# EAGLE board PCB_board (EAGLE 9.6.2)
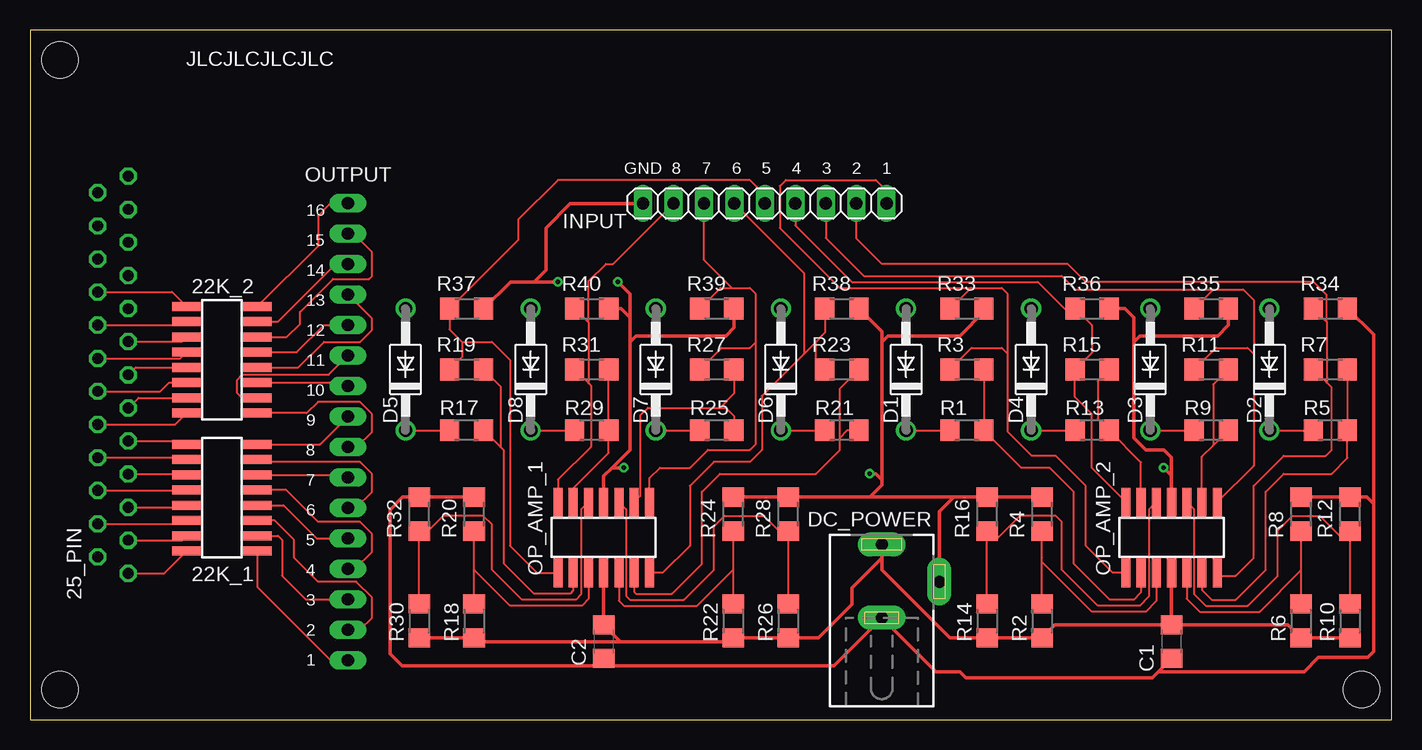
[diagram p0: board, top side]
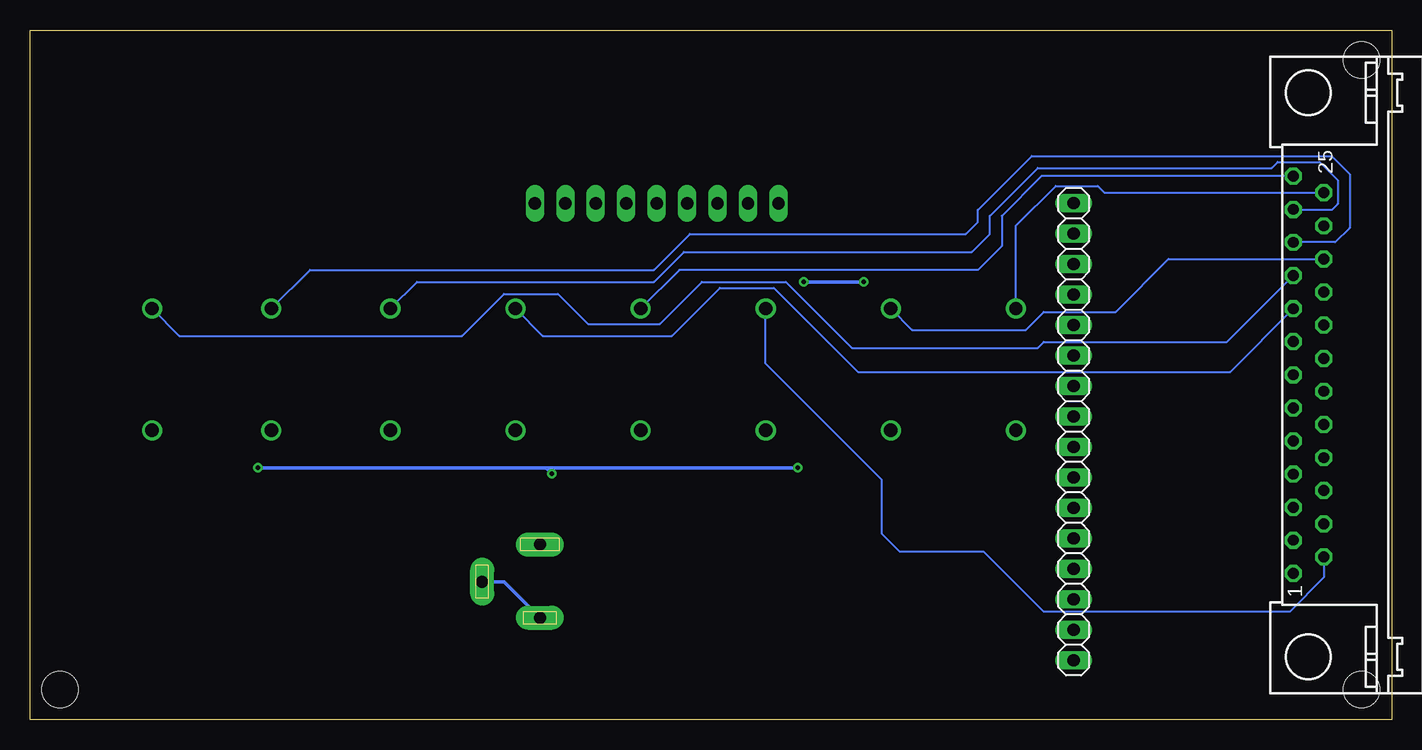
[diagram p1: board, bottom side, seen from below]

Size 113.5 x 57.5 mm. Coordinates in mm from the lower left corner, seen from the top.
Outline: 0,0 113.5,0 113.5,57.5 0,57.5 0,0
Copper layers (1*16): Top 0.035mm / dielectric 1.5mm / Bottom 0.035mm
Design rules "default": minimum track width 6mil, minimum drill 0.35mm, track to track 6mil, track to pad 6mil, pad to pad 6mil, via to via 6mil, smd to smd 6mil, copper to edge 40mil, drill to drill 6mil, minimum pad ring 10mil, minimum via ring 8mil, stop-mask expansion 4mil, vias tented up to drill 0mil, thermal gap 10mil
Holes 3 mm at 2.5,2.5 2.5,55 111,2.5

## Footprints (pad centres in the part's own frame; a part is rotated, then mirrored left to right if it is on the bottom)
1365-16 = smd 0.76 x 2.4: 1 -4.445,-2.95; 2 -4.445,2.95; 3 -3.175,-2.95; 4 -3.175,2.95; 5 -1.905,-2.95; 6 -1.905,2.95; 7 -0.635,-2.95; 8 -0.635,2.95; 9 0.635,-2.95; 10 0.635,2.95; 11 1.905,-2.95; 12 1.905,2.95; 13 3.175,-2.95; 14 3.175,2.95; 15 4.445,-2.95; 16 4.445,2.95
M25-HD-20 = drill 0.9 pad 1.3 octagon: 1 -16.561,1.27; 2 -13.792,1.27; 3 -11.049,1.27; 4 -8.28,1.27; 5 -5.512,1.27; 6 -2.769,1.27; 7 0,1.27; 8 2.769,1.27; 9 5.512,1.27; 10 8.28,1.27; 11 11.049,1.27; 12 13.792,1.27; 13 16.561,1.27; 14 -15.189,-1.27; 15 -12.421,-1.27; 16 -9.652,-1.27; 17 -6.909,-1.27; 18 -4.14,-1.27; 19 -1.372,-1.27; 20 1.372,-1.27; 21 4.14,-1.27; 22 6.909,-1.27; 23 9.652,-1.27; 24 12.421,-1.27; 25 15.189,-1.27
C1206 = smd 1.6 x 1.8: 1 -1.4,0; 2 1.4,0
DO41-10 = drill 1.118: A 5.08,0; C -5.08,0
DCJ0303 = drill 1 pad 2 long: 1 0,3.1; 2 4.8,0; 3 0,-3
1X09 = drill 1.016 long: 1 -10.16,0; 2 -7.62,0; 3 -5.08,0; 4 -2.54,0; 5 0,0; 6 2.54,0; 7 5.08,0; 8 7.62,0; 9 10.16,0
1365-14 = smd 0.76 x 2.4: 1 -3.81,-2.95; 2 -3.81,2.95; 3 -2.54,-2.95; 4 -2.54,2.95; 5 -1.27,-2.95; 6 -1.27,2.95; 7 0,-2.95; 8 0,2.95; 9 1.27,-2.95; 10 1.27,2.95; 11 2.54,-2.95; 12 2.54,2.95; 13 3.81,-2.95; 14 3.81,2.95
1X16 = drill 1.016 long: 1 -19.05,0; 2 -16.51,0; 3 -13.97,0; 4 -11.43,0; 5 -8.89,0; 6 -6.35,0; 7 -3.81,0; 8 -1.27,0; 9 1.27,0; 10 3.81,0; 11 6.35,0; 12 8.89,0; 13 11.43,0; 14 13.97,0; 15 16.51,0; 16 19.05,0
R1206 = smd 1.6 x 1.803: 1 -1.422,0; 2 1.422,0

## Placement (x,y rotation side)
22K_1  1365-16  [1365-16]  16,18.5 90 top
22K_2  1365-16  [1365-16]  16,30 90 top
25_PIN  M25-HD-20  [M25-HD-20]  6.92,28.75 90 bottom
C1  0.0000001  [C1206]  95.16,6.5 270 top
C2  0.0000001  [C1206]  47.82,6.5 270 top
D1  1N4004  [DO41-10]  73.03,29.19 90 top
D2  1N4004  [DO41-10]  103.32,29.19 90 top
D3  1N4004  [DO41-10]  93.39,29.19 90 top
D4  1N4004  [DO41-10]  83.46,29.19 90 top
D5  1N4004  [DO41-10]  31.31,29.19 90 top
D6  1N4004  [DO41-10]  62.6,29.19 90 top
D7  1N4004  [DO41-10]  52.17,29.19 90 top
D8  1N4004  [DO41-10]  41.74,29.19 90 top
DC_POWER  [DCJ0303]  71,11.5 0 top
INPUT  [1X09]  61.26,43.03 180 top
OP_AMP_1  1365-14  [1365-14]  47.82,15.18 0 top
OP_AMP_2  1365-14  [1365-14]  95.16,15.18 0 top
OUTPUT  [1X16]  26.5,24 270 bottom
R1  1000000  [R1206]  78.11,24.11 0 top
R2  1000000  [R1206]  84.36,8.23 90 top
R3  200000  [R1206]  78.11,29.19 180 top
R4  200000  [R1206]  84.36,17.12 270 top
R5  1000000  [R1206]  108.4,24.11 0 top
R6  1000000  [R1206]  105.95,8.23 90 top
R7  200000  [R1206]  108.4,29.19 180 top
R8  200000  [R1206]  105.95,17.12 270 top
R9  1000000  [R1206]  98.47,24.11 0 top
R10  1000000  [R1206]  110.03,8.23 90 top
R11  200000  [R1206]  98.47,29.19 180 top
R12  200000  [R1206]  110.03,17.12 270 top
R13  1000000  [R1206]  88.54,24.11 0 top
R14  1000000  [R1206]  79.78,8.23 90 top
R15  200000  [R1206]  88.54,29.19 180 top
R16  200000  [R1206]  79.78,17.12 270 top
R17  1000000  [R1206]  36.39,24.11 0 top
R18  1000000  [R1206]  37.02,8.23 90 top
R19  200000  [R1206]  36.39,29.19 180 top
R20  200000  [R1206]  37.02,17.12 270 top
R21  1000000  [R1206]  67.68,24.11 0 top
R22  1000000  [R1206]  58.62,8.23 90 top
R23  200000  [R1206]  67.68,29.19 180 top
R24  200000  [R1206]  58.62,17.12 270 top
R25  1000000  [R1206]  57.25,24.11 0 top
R26  1000000  [R1206]  63.2,8.23 90 top
R27  200000  [R1206]  57.25,29.19 180 top
R28  200000  [R1206]  63.2,17.12 270 top
R29  1000000  [R1206]  46.82,24.11 0 top
R30  1000000  [R1206]  32.45,8.23 90 top
R31  200000  [R1206]  46.82,29.19 180 top
R32  200000  [R1206]  32.45,17.12 270 top
R33  10000  [R1206]  78.11,34.27 180 top
R34  10000  [R1206]  108.4,34.27 180 top
R35  10000  [R1206]  98.47,34.27 180 top
R36  10000  [R1206]  88.54,34.27 180 top
R37  10000  [R1206]  36.39,34.27 180 top
R38  10000  [R1206]  67.68,34.27 180 top
R39  10000  [R1206]  57.25,34.27 180 top
R40  10000  [R1206]  46.82,34.27 180 top

## Library data of the parts
22K_1 22K_2 OP_AMP_1 OP_AMP_2 = con-leotronics; OC_FARNELL: unknown; OC_NEWARK: unknown
25_PIN = con-subd; OC_FARNELL: unknown; OC_NEWARK: unknown
C1 C2 = rcl; SPICEPREFIX: C
D1-D8 = diode
DC_POWER = con-jack; OC_FARNELL: unknown; OC_NEWARK: unknown
INPUT OUTPUT = pinhead
R1-R40 = rcl; SPICEPREFIX: R

## Nets
GND: C1.2 C2.2 DC_POWER.2 DC_POWER.3 INPUT.9 OP_AMP_1.8 OP_AMP_2.8 R4.1 R8.1 R12.1 R16.1 R20.1 R24.1 R28.1 R32.1 R33.1 R34.1 R35.1 R36.1 R37.1 R38.1 R39.1 R40.1
IN_1: D1.C R1.1
IN_2: D2.C R5.1
IN_3: D3.C R9.1
IN_4: D4.C R13.1
IN_5: D5.C R17.1
IN_6: D6.C R21.1
IN_7: D7.C R25.1
IN_8: D8.C R29.1
INV_1A: OP_AMP_2.3 R1.2 R3.1
INV_1B: OP_AMP_2.11 R5.2 R7.1
INV_1C: OP_AMP_2.12 R9.2 R11.1
INV_1D: OP_AMP_2.4 R13.2 R15.1
INV_2A: OP_AMP_1.3 R17.2 R19.1
INV_2B: OP_AMP_1.11 R21.2 R23.1
INV_2C: OP_AMP_1.12 R25.2 R27.1
INV_2D: OP_AMP_1.4 R29.2 R31.1
N$1: 25_PIN.9 D1.A
N$2: 25_PIN.10 D2.A
N$3: 25_PIN.11 D3.A
N$4: 25_PIN.12 D4.A
N$5: 25_PIN.25 D5.A
N$6: 25_PIN.13 D6.A
N$7: 25_PIN.23 D8.A
N$8: 25_PIN.14 D7.A
NON_1A: OP_AMP_2.5 R2.2 R4.2
NON_1B: OP_AMP_2.9 R6.2 R8.2
NON_1C: OP_AMP_2.10 R10.2 R12.2
NON_1D: OP_AMP_2.6 R14.2 R16.2
NON_2A: OP_AMP_1.5 R18.2 R20.2
NON_2B: OP_AMP_1.9 R22.2 R24.2
NON_2C: OP_AMP_1.10 R26.2 R28.2
NON_2D: OP_AMP_1.6 R30.2 R32.2
O_1: 22K_1.1 OUTPUT.16
O_2: 22K_1.5 OUTPUT.15
O_3: 22K_1.3 OUTPUT.14
O_4: 22K_1.9 OUTPUT.13
O_5: 22K_1.7 OUTPUT.12
O_6: 22K_1.13 OUTPUT.11
O_7: 22K_1.11 OUTPUT.10
O_8: 22K_2.1 OUTPUT.9
O_9: 22K_1.15 OUTPUT.8
O_10: 22K_2.5 OUTPUT.7
O_11: 22K_2.3 OUTPUT.6
O_12: 22K_2.9 OUTPUT.5
O_13: 22K_2.7 OUTPUT.4
O_14: 22K_2.13 OUTPUT.3
O_15: 22K_2.11 OUTPUT.2
O_16: 22K_2.15 OUTPUT.1
OUT_1: 22K_1.2 25_PIN.1
OUT_1A: INPUT.1 OP_AMP_2.1 R3.2 R33.2
OUT_1B: INPUT.2 OP_AMP_2.13 R7.2 R34.2
OUT_1C: INPUT.3 OP_AMP_2.14 R11.2 R35.2
OUT_1D: INPUT.4 OP_AMP_2.2 R15.2 R36.2
OUT_2: 22K_1.6 25_PIN.15
OUT_2A: INPUT.5 OP_AMP_1.1 R19.2 R37.2
OUT_2B: INPUT.6 OP_AMP_1.13 R23.2 R38.2
OUT_2C: INPUT.7 OP_AMP_1.14 R27.2 R39.2
OUT_2D: INPUT.8 OP_AMP_1.2 R31.2 R40.2
OUT_3: 22K_1.4 25_PIN.2
OUT_4: 22K_1.10 25_PIN.16
OUT_5: 22K_1.8 25_PIN.3
OUT_6: 22K_1.14 25_PIN.17
OUT_7: 22K_1.12 25_PIN.4
OUT_8: 22K_2.2 25_PIN.18
OUT_9: 22K_1.16 25_PIN.5
OUT_10: 22K_2.6 25_PIN.19
OUT_11: 22K_2.4 25_PIN.6
OUT_12: 22K_2.10 25_PIN.20
OUT_13: 22K_2.8 25_PIN.7
OUT_14: 22K_2.14 25_PIN.21
OUT_15: 22K_2.12 25_PIN.8
OUT_16: 22K_2.16 25_PIN.22
VCC: C1.1 C2.1 DC_POWER.1 OP_AMP_1.7 OP_AMP_2.7 R2.1 R6.1 R10.1 R14.1 R18.1 R22.1 R26.1 R30.1

## Tracks (layer width: path | path; a pad name or v marks a point on that pad's centre or on a via)
GND  (via drill 0.35)
  Top 0.305: OP_AMP_1.8 47.82,20.32 48.5,21 | 48.5,21 50,22.5 50,31.5 | R40.1 49.27,34.27 50,33.54 | OP_AMP_2.8 95.16,20.5 | 95.16,20.5 95.16,21.84 94.5,22.5 93,22.5 92,23.5 92,31.5 | R36.1 91.27,34.27 92,33.54 92,31.5 | R20.1 R32.1 31.05,18.55 30,17.5 30,5.5 31,4.5 47.22,4.5 C2.2 48.42,4.5 67,4.5 DC_POWER.3 75.5,4 77.5,4 78,3.5 93.56,3.5 94.06,4 | R8.1 R12.1 111.45,18.55 112,18 | 112,18 112,5.67 111.5,5.17 107.39,5.17 106.23,4 94.06,4 | C1.2 94.06,4 | R24.1 R28.1 70,18.55 | 70,18.55 77,18.55 | 77,18.55 R16.1 R4.1 | DC_POWER.2 75.8,17.35 77,18.55 | 50,31.5 50,33.54 | R39.1 58.67,32.67 58,32 50.5,32 50,31.5 | 70,18.55 71,19.55 71,20 | 71,31.5 71,32.37 R38.1 | 71,31.5 71,20 | 71,31.5 71.5,32 77.5,32 79.53,34.03 R33.1 | R35.1 99.89,32.89 99,32 92.5,32 92,31.5 | R34.1 112,32.09 112,18 | R37.1 40.04,36.5 42,36.5 | 42,36.5 v44,36.5 | v49,36.5 50,35.5 50,33.54 | 95.16,20.5 95,20.5 v94.5,21 | v70,20.5 70.5,20.5 71,20 | 48.5,21 v49.5,21 | INPUT.9 45.03,43.03 43,41 43,37.5 42,36.5
  Bottom 0.305: v44,36.5 v49,36.5 | DC_POWER.3 74,11.5 DC_POWER.2 | v94.5,21 70.5,21 | 70.5,21 v70,20.5 | v49.5,21 70.5,21
IN_1
  Top 0.152: D1.C R1.1
IN_2
  Top 0.152: D2.C R5.1
IN_3
  Top 0.152: D3.C R9.1
IN_4
  Top 0.152: D4.C R13.1
IN_5
  Top 0.152: D5.C R17.1
IN_6
  Top 0.152: D6.C R21.1
IN_7
  Top 0.152: D7.C R25.1
IN_8
  Top 0.152: D8.C R29.1
INV_1A
  Top 0.152: OP_AMP_2.3 92.62,10.62 92,10 90,10 87,13 87,19 85,21 82.64,21 79.57,24.07 R1.2 R3.1
INV_1B
  Top 0.152: OP_AMP_2.11 97.7,10.8 98.5,10 100.5,10 103,12.5 103,19 104.5,20.5 108.5,20.5 109.82,21.82 109.82,24 R5.2 R7.1
INV_1C
  Top 0.152: OP_AMP_2.12 97.7,21.92 98.64,22.86 | 98.64,22.86 R9.2 | R11.1 98.64,27.94 98.64,22.86
INV_1D
  Top 0.152: OP_AMP_2.4 92.62,21.45 R13.2 89,25.07 89,28.23 R15.1
INV_2A
  Top 0.152: OP_AMP_1.3 45.28,10.78 45,10.5 42,10.5 39.5,13 39.5,22.42 39.21,22.71 | 39.21,22.71 R17.2 | R19.1 39.21,27.79 39.21,22.71
INV_2B
  Top 0.152: OP_AMP_1.11 50.36,10.64 50.5,10.5 53.5,10.5 56,13 56,19 57.5,20.5 65.5,20.5 67.5,22.5 67.5,23.5 | R23.1 67.5,27.59 67.5,23.5 | R21.2 68.11,24.11 67.5,23.5
INV_2C
  Top 0.152: OP_AMP_1.12 50.86,18.63 50.86,25.36 51.5,26 57.5,26 | 57.5,26 58,26 58.67,25.33 R25.2 | R27.1 58.67,27.17 57.5,26
INV_2D
  Top 0.152: OP_AMP_1.4 45.28,19.28 48.24,22.24 R29.2 R31.1
N$1
  Bottom 0.152: D1.A 70.76,32 60,32 56,36 51.5,36 44.5,29 13.45,29 25_PIN.9
N$2
  Bottom 0.152: D2.A 101.05,32 77.5,32 74,35.5 69.5,35.5 67,33 61,33 57.5,36.5 50.5,36.5 45,31 29.5,31 29,31.5 13.72,31.5 25_PIN.10
N$3
  Bottom 0.152: D3.A 90.16,37.5 61.5,37.5 58.5,40.5 35.5,40.5 34.5,41.5 34.5,42.5 30,47 5,47 3.5,45.5 3.5,41 4.71,39.79 25_PIN.11
N$4
  Bottom 0.152: D4.A 81.23,36.5 61.5,36.5 59,39 35,39 33.5,40.5 33.5,42 29.5,46 10,46 9.5,46.5 6,46.5 4.5,45 4.5,43 5,42.5 8.16,42.5 25_PIN.12
N$5
  Bottom 0.152: D5.A 31.31,41.19 28,44.5 24.5,44.5 23.93,43.93 25_PIN.25
N$6
  Bottom 0.152: 25_PIN.13 29.19,45.31 32.5,42 32.5,39.5 34.5,37.5 59.37,37.5 D6.A
N$7
  Bottom 0.152: D8.A 39.97,32.5 30.5,32.5 29,34 23,34 18.6,38.4 25_PIN.23
N$8
  Bottom 0.152: 25_PIN.14 5.66,11.85 8.5,9 29,9 34,14 41,14 42.5,15.5 42.5,20 52.17,29.67 D7.A
NON_1A
  Top 0.152: OP_AMP_2.5 93.89,9.89 93,9 88.5,9 84.36,13.13 | 84.36,13.13 84.36,13.5 R4.2 | R2.2 84.36,13.13
NON_1B
  Top 0.152: R8.2 105.95,12.5 105.95,12.46 | 105.95,12.46 R6.2 | OP_AMP_2.9 96.43,10.07 97.5,9 102.5,9 105.95,12.46
NON_1C
  Top 0.152: R12.2 110.03,15 | 110.03,15 R10.2 | OP_AMP_2.10 97,17.56 97,13.57 97.04,13.53 97.04,10.46 98,9.5 101.5,9.5 104,12 104,15.77 105.23,17 107.5,17 109.5,15 110.03,15
NON_1D
  Top 0.152: R14.2 79.78,15 | 79.78,15 R16.2 | OP_AMP_2.6 93.28,17.52 93.28,10.28 92.5,9.5 89,9.5 86,12.5 86,16.5 85.5,17 82.5,17 80.5,15 79.78,15
NON_2A
  Top 0.152: R18.2 37.02,12.5 | OP_AMP_1.5 46.55,10.05 46,9.5 40.02,9.5 37.02,12.5 | 37.02,12.5 R20.2
NON_2B
  Top 0.152: R24.2 58.62,12.5 | 58.62,12.5 R22.2 | OP_AMP_1.9 49.09,9.91 49.5,9.5 55.62,9.5 58.62,12.5
NON_2C
  Top 0.152: R28.2 63.2,15 | 63.2,15 R26.2 | OP_AMP_1.10 49.7,17.52 49.7,10.3 50,10 54.5,10 57,12.5 57,16.11 57.89,17 61.2,17 63.2,15
NON_2D
  Top 0.152: R30.2 32.45,15 | 32.45,15 R32.2 | OP_AMP_1.6 45.94,17.52 45.94,10.44 45.5,10 41,10 38.5,12.5 38.5,16.25 37.75,17 34.45,17 32.45,15
O_1
  Top 0.152: 22K_1.1 18.95,11.05 25.05,4.95 OUTPUT.16
O_2
  Top 0.152: OUTPUT.15 27.49,7.49 28.5,8.5 28.5,10.19 27.19,11.5 24,11.5 22,13.5 22,15 20.41,16.59 22K_1.5
O_3
  Top 0.152: 22K_1.3 20.68,15.32 21,15 21,12 22.97,10.03 OUTPUT.14
O_4
  Top 0.152: OUTPUT.13 27.07,12.57 28.5,14 28.5,15.5 27.5,16.5 24,16.5 21.36,19.14 22K_1.9
O_5
  Top 0.152: 22K_1.7 21.14,17.86 23.89,15.11 OUTPUT.12
O_6
  Top 0.152: OUTPUT.11 27.15,17.65 28.5,19 28.5,20.5 27.5,21.5 19.12,21.5 22K_1.13
O_7
  Top 0.152: 22K_1.11 26.29,20.41 OUTPUT.10
O_8
  Top 0.152: OUTPUT.9 27.23,22.73 28.5,24 28.5,25.5 27.5,26.5 24,26.5 23.05,25.55 22K_2.1
O_9
  Top 0.152: 22K_1.15 24.18,22.95 OUTPUT.8
O_10
  Top 0.152: 22K_2.5 26.21,28.09 OUTPUT.7
O_11
  Top 0.152: 22K_2.3 17.68,26.82 17.25,27.25 17.25,28.3 17.71,28.76 24.91,28.76 OUTPUT.6
O_12
  Top 0.152: 22K_2.9 22.25,30.64 24.5,32.89 OUTPUT.5
O_13
  Top 0.152: 22K_2.7 22.36,29.36 24.5,31.5 27.5,31.5 28.5,32.5 28.5,33.43 OUTPUT.4
O_14
  Top 0.152: 22K_2.13 20.68,33.17 25.47,37.97 OUTPUT.3
O_15
  Top 0.152: 22K_2.11 21.41,31.91 22.5,33 22.5,34 25.25,36.75 28.25,36.75 28.5,37 28.5,39 26.99,40.51 OUTPUT.2
O_16
  Top 0.152: OUTPUT.1 25.05,43.05 24,42 24,39.49 22K_2.15
OUT_1
  Top 0.152: 25_PIN.1 11.18,12.18 22K_1.2
OUT_1A
  Top 0.152: OP_AMP_2.1 90.27,12.23 88,14.5 88,19.5 85.5,22 83.5,22 81.5,24 81.5,30.5 | R3.2 78.5,31 81,31 81.5,30.5 | R33.2 78.42,36 | 81.5,30.5 81.5,35.5 81,36 78.5,36 78.42,36 | INPUT.1 71.42,44.09 70.5,45 63,45 62.5,44.5 62.5,41 67.5,36 78.42,36
OUT_1B
  Top 0.152: OP_AMP_2.13 99.2,12 100.5,12 102,13.5 102,19.5 104.5,22 108,22 108.5,22.5 108.5,27.67 108.08,28.08 | 108.08,28.08 R7.2 | R34.2 108.08,33.16 | 108.08,33.16 108.08,28.08 | 108.08,33.16 108.08,35.42 107,36.5 88,36.5 86.5,38 71,38 68.88,40.12 INPUT.2
OUT_1C
  Top 0.152: OP_AMP_2.14 102,21.16 102,30.5 | R11.2 98.86,31 101.5,31 102,30.5 | R35.2 98.64,35.86 | 102,30.5 102,35 101.14,35.86 98.64,35.86 | 98.64,35.86 87.14,35.86 86,37 69.5,37 66.33,40.16 INPUT.3
OUT_1D
  Top 0.152: OP_AMP_2.2 88.5,20.98 88.5,25.5 87.12,26.88 R15.2 88.5,30.57 88.5,32.89 R36.2 | R36.2 86.62,34.27 | INPUT.4 63.8,41.2 68.5,36.5 84,36.5 86.23,34.27 R36.2
OUT_2
  Top 0.152: 25_PIN.15 12.78,16.32 22K_1.6
OUT_2A
  Top 0.152: 36,31.5 34.97,32.53 R37.2 40.7,40 40.7,41.7 44,45 60,45 61.26,43.74 INPUT.5 | 36,31.5 36,30.22 R19.2 | 36,31.5 38.5,31.5 40,30 40,14.5 42.27,12.23 OP_AMP_1.1
OUT_2B
  Top 0.152: R38.2 66.26,32.26 65.5,31.5 | R23.2 65.5,29.95 65.5,31.5 | OP_AMP_1.13 52.73,12.23 55,14.5 55,19.5 57,21.5 60,21.5 61,22.5 61,27 64.5,30.5 | 65.5,31.5 64.5,30.5 | INPUT.6 64.5,37.25 64.5,30.5
OUT_2C
  Top 0.152: OP_AMP_1.14 51.63,20.13 52.5,21 55,21 56.5,22.5 60,22.5 60.5,23 60.5,31.5 | 58.5,36 57.56,36 R39.2 | 58.5,36 60,36 60.5,35.5 60.5,31.5 | R27.2 57.64,31 60,31 60.5,31.5 | 58.5,36 56.17,38.33 INPUT.7
OUT_2D
  Top 0.152: R31.2 46.54,28.04 | 46.54,28.04 46.75,27.84 46.75,22.75 44.01,20.01 OP_AMP_1.2 | R40.2 46.54,33.12 | 46.54,33.12 46.54,28.04 | 46.54,33.12 46.54,36.54 48,38 48.6,38 INPUT.8
OUT_3
  Top 0.152: 25_PIN.2 12.68,14.95 22K_1.4
OUT_4
  Top 0.152: 25_PIN.16 13.01,19.09 22K_1.10
OUT_5
  Top 0.152: 25_PIN.3 12.88,17.7 22K_1.8
OUT_6
  Top 0.152: 25_PIN.17 12.89,21.84 22K_1.14
OUT_7
  Top 0.152: 25_PIN.4 12.99,20.46 22K_1.12
OUT_8
  Top 0.152: 25_PIN.18 12.1,24.61 22K_2.2
OUT_9
  Top 0.152: 25_PIN.5 12.76,23.23 22K_1.16
OUT_10
  Top 0.152: 25_PIN.19 10.87,27.37 11.6,28.09 22K_2.6
OUT_11
  Top 0.152: 25_PIN.6 9.04,26.82 22K_2.4
OUT_12
  Top 0.152: 25_PIN.20 12.53,30.12 22K_2.10
OUT_13
  Top 0.152: 25_PIN.7 8.81,29.36 22K_2.8
OUT_14
  Top 0.152: 25_PIN.21 12.76,32.88 22K_2.14
OUT_15
  Top 0.152: 25_PIN.8 12.66,31.51 22K_2.12
OUT_16
  Top 0.152: 25_PIN.22 11.84,35.65 22K_2.16
VCC
  Top 0.305: R30.1 37,6.81 | 37,6.81 R18.1 | 95,7.91 85.46,7.91 R2.1 R14.1 76.69,6.81 71,12.5 71,13.5 | 95,7.91 C1.1 104.86,7.91 R6.1 R10.1 | DC_POWER.1 71,13.5 | 71,13.5 68.5,11 68.5,9.6 65.71,6.81 R26.1 R22.1 58.3,6.5 49.23,6.5 | OP_AMP_2.7 95.16,8.07 95,7.91 | 37,6.81 37.31,6.5 49.23,6.5 | OP_AMP_1.7 C2.1 49.23,6.5

## Text on the board
tNames: JLCJLCJLCJLC | GND | 8 | 7 | 6 | 5 | 4 | 3 | 2 | 1 | 16 | 15 | 14 | 13 | 12 | 11 | 10 | 9 | 8 | 7 | 6 | 5 | 4 | 3 | 2 | 1